# Altium PCB Review_2510_RegulationChauffage_Motherboard.PcbDoc (part 2 of 2)
Units mm, origin at the board's own origin, x right, y up, seen from the top; angles counter-clockwise.
Board outline 110.26 x 190.25 mm, 2 copper layers (Top Layer, Bottom Layer), stack 1.586 mm thick; 113 components, 95 nets, 627 pads, 337 vias.
Unrouted connection lines stored in the file: 154.
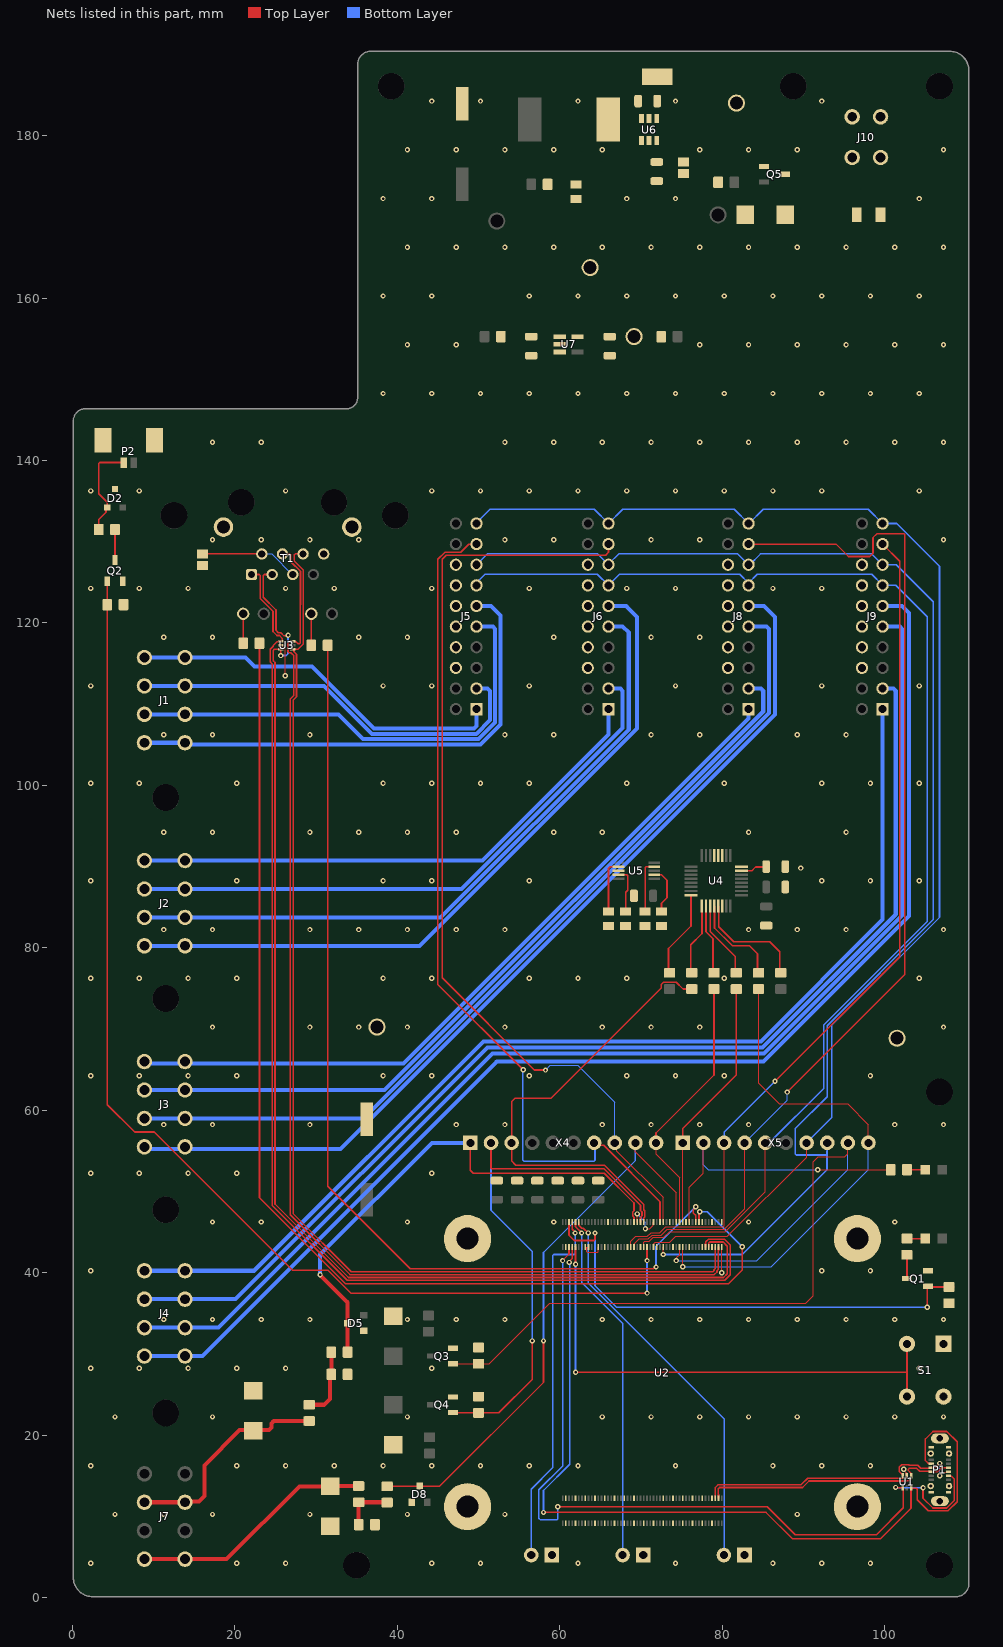
[diagram p2: the nets of this part, all layers, seen from the top]

## Via types
v1: diameter 0.65, hole 0.3, Top Layer to Bottom Layer, tented top, 337 vias

## Nets (pads, with @x,y where several pads share a name; then routed paths per layer and width w, separated by ;. In a path a pad name is that pad's centre, name@x,y a point inside that pad or via, vN(x,y) a via of type N, cw(c..) or ccw(c..) an arc to the next point about the centre after c; other vN are vias at no path point) (continued)
BOILER_IN+_1: J1.5 J1.6 J5.9 | length 59.2
  Bottom Layer w0.5: J1.6@8.87,108.75 J1.5@13.87,108.75 32.75,108.75 35.802,105.698 49.996,105.698 52.056,107.758 52.056,119.257 51.763,119.55 J5.9@49.75,119.55
BOILER_IN+_2: J2.5 J2.6 J6.9 | length 84.8
  Bottom Layer w0.5: J2.6@8.25,83.75 J2.5@13.87,83.75 45.341,83.75 68.5,106.909 68.5,118.8 67.75,119.55 J6.9@66,119.55 J6.9@65.75,119.55
BOILER_IN+_3: J3.5 J3.6 J8.9 | length 111.3
  Bottom Layer w0.5: J3.6@8.5,59 13.62,59 13.87,58.75 J3.5@13.87,59 35.856,59 85.75,108.894 85.75,119.257 85.457,119.55 J8.9@83.25,119.55
BOILER_IN+_4: J4.5 J4.6 J9.9 | length 152.7
  Bottom Layer w0.5: J4.6@8.25,33.25 J4.5@13.87,33.25 18,33.25 51.75,67 85.153,67 102.16,84.007 102.16,119.257 101.867,119.55 J9.9@99.75,119.55
BOILER_IN-_1: J1.7 J1.8 J5.11 | length 61.8
  Bottom Layer w0.5: J1.8@8.87,105.25 J1.7@13.87,105.25 14.073,105.047 50.266,105.047 52.707,107.488 52.707,120.923 51.54,122.09 J5.11@49.75,122.09
BOILER_IN-_2: J2.7 J2.8 J6.11 | length 90.1
  Bottom Layer w0.5: J2.8@8.25,80.25 J2.7@13.87,80.25 42.762,80.25 69.5,106.988 69.5,120.75 68.188,122.062 J6.11@66,122.062
BOILER_IN-_3: J3.7 J3.8 J8.11 | length 116.2
  Bottom Layer w0.5: J3.8@8.25,55.25 13.87,55.25 33.026,55.25 86.5,108.724 86.5,120.75 85.16,122.09 J8.11@83.25,122.09
BOILER_IN-_4: J4.7 J4.8 J9.11 | length 158.1
  Bottom Layer w0.5: J4.8@8.25,29.75 J4.7@13.87,29.75 16,29.75 52.25,66 85.073,66 103,83.927 103,121.25 102.16,122.09 J9.11@99.75,122.09
CM_24V_OUT_1: Q3.1 R19.2 U2.28 X5.9 | length 101.3
  Top Layer w0.15: Q3.1@46.85,28.8 R19.2@50,28.8 51.3,28.8 58.745,36.245 90.302,36.245 91.199,37.142 91.199,53.699 91.804,54.304 95.105,54.304 95.47,54.669 X5.9@95.47,56 ; v1(74.35,41.5) 74.414,41.564 74.414,41.914 74.75,42.25 U2.28@74.75,43.17
  Bottom Layer w0.15: v1(74.35,41.5) 84.275,41.5 95.47,52.695 X5.9@95.47,56
CM_24V_OUT_2: Q4.1 R25.2 U2.51 X4.2 | length 68.4
  Top Layer w0.2: Q4.1@46.85,22.8 46.875,22.775 49.975,22.775 R25.2@50,22.75 52.5,22.75 56.62,26.87 v1(56.62,31.607) ; X4.2@51.54,56 51.54,52.889 51.628,52.801 65.463,52.801 69.95,48.314 69.95,47.661 70.126,47.485 70.126,47.008 69.95,46.832 U2.51@69.95,46.25
  Bottom Layer w0.2: X4.2@51.54,56 51.54,47.71 56.62,42.63 v1(56.62,31.607)
CM_24V_SENSE_1: D5.3 R21.2 U2.55 X4.1 | length 65.3
  Top Layer w0.2: X4.1@49,56 49,52.617 49.367,52.25 65.5,52.25 69.15,48.6 69.15,47.661 68.974,47.485 68.974,47.008 69.15,46.832 U2.55@69.15,46.25
  Top Layer w0.5: v1(30.5,39.75) 33.88,36.37 R21.2@33.88,30.225
  Bottom Layer w0.5: v1(30.5,39.75) 30.5,42.25 44.25,56 X4.1@49,56
CM_24V_SENSE_2: D8.3 R26.2 U2.29 X4.9 | length 70.6
  Top Layer w0.15: X4.9@69.32,56 69.32,54.878 74.35,49.848 U2.29@74.35,46.25
  Top Layer w0.2: R26.2@38.75,13.707 45.207,13.707 58,26.5 v1(58,31.607)
  Bottom Layer w0.2: v1(58,31.607) 58,42.5 69.32,53.82 X4.9@69.32,56
CMD_RELAY: J5.13 J6.13 J8.13 J9.13 U2.50 X5.5 | length 158.2
  Top Layer w0.15: U2.50@70.35,43.17 70.35,43.745 70.497,43.892 71.051,43.892 71.507,44.348 72.393,44.348 72.793,44.348 73.517,45.072 80.393,45.072 85.31,49.989 X5.5@85.31,56
  Bottom Layer w0.2: J5.13@49.75,124.63 49.75,124.96 50.79,126 64.63,126 J6.13@66,124.63 67.37,126 82.162,126 J8.13@83.25,124.912 ; J8.13@83.25,124.63 J8.13@83.25,124.912 ; X5.5@85.31,56 85.809,56 92.5,62.691 92.5,70.5 105.25,83.25 105.25,120.75 101.37,124.63 J9.13@99.75,124.63 99.75,124.67 98.42,126 84.33,126 83.25,124.92 J8.13@83.25,124.912
CS_ADC: R8.2 U2.49 X4.3 | length 56.9
  Top Layer w0.2: U2.49@70.35,46.25 70.35,46.736 70.477,46.863 70.477,47.631 70.35,47.758 70.35,48.411 65.511,53.25 54.588,53.25 54.08,53.758 X4.3@54.08,56 54.08,61.08 54.5,61.5 58.92,61.5 72.52,75.1 72.52,75.52 72.782,75.782 74.335,75.782 75.186,74.931 R8.2@76.261,74.931
ETH_LEDG: R2.2 U2.15 | length 143.9
  Top Layer w0.2: R2.2@23.035,117.5 23.035,49.251 33.623,38.663 80.775,38.663 82.466,40.354 v1(82.466,43.21) ; U2.15@77.15,46.25 77.15,47.276 77.252,47.378 v1(77.252,47.5)
  Bottom Layer w0.2: v1(77.252,47.5) 78.176,47.5 v1(82.466,43.21)
ETH_LEDY: R3.2 U2.17 | length 122.9
  Top Layer w0.2: R3.2@31.425,117.25 31.425,50.663 41.602,40.486 71.518,40.486 71.743,40.711 v1(71.86,40.711) ; U2.17@76.75,46.25 76.75,47.065 76.451,47.364 76.451,47.723 76.75,48.022 v1(76.75,48.144)
  Bottom Layer w0.2: v1(71.86,40.711) 71.86,43.254 v1(76.75,48.144)
ETH_RD_N: T1.6 U2.6 U3.4 | length 141.8
  Top Layer w0.2: U3.4@27.135,116.75 27.232,116.75 27.287,116.695 27.287,116.452 27.601,116.137 27.601,110.916 27.174,110.489 27.174,47.287 34.326,40.135 78.879,40.135 78.997,40.253 78.997,40.388 79.17,40.562 79.17,42.675 79.15,42.696 U2.6@79.15,43.17 ; U3.4@27.232,116.805 27.254,116.783 27.822,116.783 28.438,117.398 28.438,117.861 28.414,117.885 28.414,122.06 28.445,122.091 28.445,126.503 27.315,127.633 27.315,128.383 27.432,128.5 T1.6@28.405,128.5
ETH_RD_P: T1.4 U2.4 U3.6 | length 143.9
  Top Layer w0.2: T1.4@25.865,128.5 26.838,128.5 26.955,128.383 26.955,127.484 28.086,126.354 28.086,122.24 28.055,122.209 28.055,117.736 28.078,117.713 28.078,117.547 27.961,117.43 27.795,117.43 27.53,117.695 27.19,117.695 U3.6@27.135,117.75 ; U3.6@26.968,117.656 26.701,117.656 26.554,117.509 26.554,116.491 26.701,116.344 26.887,116.344 27.242,115.989 27.242,111.065 26.815,110.637 26.815,47.138 34.177,39.776 79.028,39.776 79.356,40.104 79.356,40.24 79.53,40.413 79.53,42.675 79.55,42.696 U2.4@79.55,43.17
ETH_TD_N: T1.3 U2.10 U3.3 | length 149.7
  Top Layer w0.2: T1.3@24.595,125.96 23.622,125.96 23.505,125.843 23.505,123.166 25.066,121.604 25.066,119.086 25.343,118.809 25.643,118.809 26.046,118.406 26.471,118.406 v1(26.554,118.489) ; v1(25.665,115.989) U3.3@25.665,116.75 24.855,116.75 24.722,116.617 24.722,115.358 24.95,115.13 24.95,48.475 34,39.425 80.171,39.425 80.642,39.897 80.642,43.283 80.14,43.785 78.467,43.785 78.35,43.667 U2.10@78.35,43.17
  Bottom Layer w0.2: v1(25.665,115.989) 26.351,115.989 26.554,116.192 v1(26.554,118.489)
ETH_TD_P: T1.1 U2.12 U3.1 | length 149.3
  Top Layer w0.2: T1.1@22.055,125.96 23.028,125.96 23.145,125.843 23.145,123.017 24.707,121.456 24.707,118.937 25.194,118.45 25.494,118.45 25.856,118.088 25.856,117.805 25.801,117.75 25.49,117.75 25.443,117.703 25.203,117.703 24.722,117.222 24.722,117.125 24.363,116.766 24.363,115.209 24.591,114.981 24.591,48.326 33.851,39.066 80.319,39.066 81.002,39.748 81.002,43.431 80.289,44.144 78.318,44.144 77.991,43.816 77.991,43.685 77.95,43.644 U2.12@77.95,43.17
FRONT_LED: Q2.1 R7.2 U2.48 | length 146.2
  Top Layer w0.2: Q2.1@4.3,125.14 R7.2@4.3,122.25 4.3,60.7 7.675,57.325 10.1,57.325 27.099,40.326 31.464,40.326 34.29,37.5 v1(70.75,37.5) ; v1(70.75,41.5) U2.48@70.75,43.17
  Bottom Layer w0.2: v1(70.75,37.5) v1(70.75,41.5)
GND: C1.2 C2.2 C3.1 C4.2 C5.2 C6.2 C7.2 C8.2 C9.2 C10.2 C11.1 C13.2 C14.1 C15.1 C16.1 C17.1 C18.2 D2.3 D3.2 D4.2 D5.1 D6.2 D7.2 D8.1 D9.2 J5.6 J5.8 J5.10 J5.12 J5.14 J5.16 J6.6 J6.8 J6.10 J6.12 J6.14 J6.16 J8.6 J8.8 J8.10 J8.12 J8.14 J8.16 J9.6 J9.8 J9.10 J9.12 J9.14 J9.16 J10.3 J10.4 P1.A1 P1.A12 P1.B1 P1.B12 P1.Shell P2.MP1 P2.MP2 Q1.2 Q2.2 Q3.2 Q4.2 Q5.1 R5.1 R7.1 R14.1 R15.1 R16.1 R17.1 R19.1 R22.1 R25.1 R27.1 R30.1 S1.13 T1.8 T1.Shell TP1.1 TP2.1 TP3.1 TP4.1 U1.2 U2.1 U2.2 U2.7 U2.8 U2.13 U2.14 U2.22 U2.23 U2.32 U2.33 U2.42 U2.43 U2.52 U2.53 U2.59 U2.60 U2.65 U2.66 U2.71 U2.74 U2.98 U2.107 U2.108 U2.113 U2.114 U2.119 U2.120 U2.125 U2.126 U2.131 U2.132 U2.137 U2.138 U2.144 U2.150 U2.155 U2.156 U2.161 U2.162 U2.167 U2.168 U2.173 U2.174 U2.179 U2.180 U2.185 U2.186 U2.191 U2.192 U2.197 U2.198 U2.SH1 U2.SH2 U2.SH3 U2.SH4 U3.2 U4.14 U4.24 U4.27 U4.28 U4.29 U5.3 U6.4 U7.2 X1.1 X2.1 X3.1 | length 13.1
  Top Layer w0.15: U3.2@25.665,117.25 25.745,117.17 26.05,117.17 26.221,116.999 26.221,113.544 v1(26.193,113.516) ; U2.53@69.55,46.25 v1(69.55,47.247) ; v1(70.55,45.435) 71.104,45.435 71.525,45.855 71.525,46.225 U2.43@71.55,46.25 ; U2.8@78.75,43.17 U2.8@78.775,43.195 ; v1(79.932,40.001) 79.941,40.01 79.941,43.161 U2.2@79.95,43.17 ; v1(102.354,15.806) 102.354,15.701 102.67,15.385 102.67,15.08 U1.2@102.75,15
  Bottom Layer w0.15: v1(69.55,47.247) 70.55,46.247 v1(70.55,45.435)
  other v1: 2.25,4.25 20.25,4.25 26.25,4.25 44.25,4.25 50.25,4.25 62.25,4.25 74.25,4.25 86.25,4.25 92.25,4.25 98.25,4.25 5.25,10.25 11.25,10.25 17.25,10.25 29.25,10.25 41.25,10.25 53.25,10.25 89.25,10.25 2.25,16.25 20.25,16.25 26.25,16.25 32.25,16.25 38.25,16.25 44.25,16.25 50.25,16.25 56.25,16.25 62.25,16.25 74.25,16.25 86.25,16.25 92.25,16.25 98.25,16.25 5.25,22.25 17.25,22.25 41.25,22.25 65.25,22.25 71.25,22.25 77.25,22.25 83.25,22.25 89.25,22.25 95.25,22.25 101.25,22.25 107.25,22.25 2.25,28.25 8.25,28.25 14.25,28.25 20.25,28.25 26.25,28.25 44.25,28.25 104.25,28.25 11.25,34.25 17.25,34.25 23.25,34.25 29.25,34.25 41.25,34.25 47.25,34.25 53.25,34.25 65.25,34.25 71.25,34.25 77.25,34.25 83.25,34.25 89.25,34.25 95.25,34.25 101.25,34.25 107.25,34.25 2.25,40.25 92.25,40.25 98.25,40.25 17.25,46.25 23.25,46.25 41.25,46.25 59.25,46.25 83.25,46.25 101.25,46.25 2.25,52.25 8.25,52.25 14.25,52.25 20.25,52.25 44.25,52.25 11.25,58.25 17.25,58.25 29.25,58.25 47.25,58.25 53.25,58.25 65.25,58.25 71.25,58.25 77.25,58.25 83.25,58.25 101.25,58.25 107.25,58.25 2.25,64.25 8.25,64.25 14.25,64.25 20.25,64.25 38.25,64.25 44.25,64.25 56.25,64.25 68.25,64.25 74.25,64.25 80.25,64.25 98.25,64.25 17.25,70.25 29.25,70.25 35.25,70.25 41.25,70.25 53.25,70.25 65.25,70.25 71.25,70.25 77.25,70.25 107.25,70.25 2.25,76.25 8.25,76.25 14.25,76.25 20.25,76.25 38.25,76.25 44.25,76.25 56.25,76.25 62.25,76.25 68.25,76.25 80.25,76.25 104.25,76.25 11.25,82.25 17.25,82.25 29.25,82.25 35.25,82.25 41.25,82.25 47.25,82.25 53.25,82.25 83.25,82.25 89.25,82.25 95.25,82.25 107.25,82.25 2.25,88.25 20.25,88.25 38.25,88.25 44.25,88.25 56.25,88.25 92.25,88.25 98.25,88.25 104.25,88.25 89.66,89.82 11.25,94.25 17.25,94.25 29.25,94.25 35.25,94.25 41.25,94.25 47.25,94.25 59.25,94.25 65.25,94.25 83.25,94.25 95.25,94.25 2.25,100.25 8.25,100.25 20.25,100.25 38.25,100.25 44.25,100.25 50.25,100.25 56.25,100.25 68.25,100.25 80.25,100.25 92.25,100.25 98.25,100.25 104.25,100.25 11.25,106.25 17.25,106.25 29.25,106.25 53.25,106.25 59.25,106.25 71.25,106.25 77.25,106.25 89.25,106.25 95.25,106.25 2.25,112.25 38.25,112.25 44.25,112.25 56.25,112.25 74.25,112.25 92.25,112.25 104.25,112.25 11.25,118.25 17.25,118.25 35.25,118.25 41.25,118.25 59.25,118.25 71.25,118.25 77.25,118.25 2.25,124.25 8.25,124.25 14.25,124.25 26.25,124.25 32.25,124.25 44.25,124.25 56.25,124.25 68.25,124.25 74.25,124.25 86.25,124.25 92.25,124.25 17.25,130.25 23.25,130.25 29.25,130.25 35.25,130.25 53.25,130.25 59.25,130.25 71.25,130.25 77.25,130.25 107.25,130.25 2.25,136.25 8.25,136.25 26.25,136.25 44.25,136.25 50.25,136.25 56.25,136.25 62.25,136.25 68.25,136.25 74.25,136.25 80.25,136.25 86.25,136.25 92.25,136.25 104.25,136.25 17.25,142.25 23.25,142.25 53.25,142.25 59.25,142.25 65.25,142.25 71.25,142.25 77.25,142.25 83.25,142.25 89.25,142.25 95.25,142.25 101.25,142.25 107.25,142.25 38.25,148.25 44.25,148.25 50.25,148.25 56.25,148.25 62.25,148.25 68.25,148.25 74.25,148.25 80.25,148.25 86.25,148.25 92.25,148.25 98.25,148.25 104.25,148.25 41.25,154.25 47.25,154.25 77.25,154.25 83.25,154.25 89.25,154.25 95.25,154.25 101.25,154.25 107.25,154.25 38.25,160.25 44.25,160.25 56.25,160.25 62.25,160.25 68.25,160.25 74.25,160.25 80.25,160.25 86.25,160.25 92.25,160.25 98.25,160.25 104.25,160.25 41.25,166.25 47.25,166.25 53.25,166.25 59.25,166.25 65.25,166.25 71.25,166.25 77.25,166.25 83.25,166.25 89.25,166.25 95.25,166.25 101.25,166.25 107.25,166.25 38.25,172.25 44.25,172.25 68.25,172.25 74.25,172.25 104.25,172.25 41.25,178.25 47.25,178.25 53.25,178.25 59.25,178.25 65.25,178.25 77.25,178.25 83.25,178.25 89.25,178.25 107.25,178.25 44.25,184.25 50.25,184.25 62.25,184.25 74.25,184.25 92.25,184.25
IN_24V_SENSE_1: D4.1 J7.3 J7.4 R20.2 | length 27.6
  Top Layer w0.5: J7.4@8.25,11.75 13.25,11.75 13.327,11.827 15.577,11.827 16.25,12.5 16.25,16.3 20.6,20.65 22.175,20.65 D4.1@22.25,20.575 ; D4.1@22.325,20.65 24.207,20.65 24.5,20.943 24.5,21.457 24.793,21.75 R20.2@29.267,21.75
IN_24V_SENSE_2: D6.1 J7.7 J7.8 R24.2 | length 30.7
  Top Layer w0.5: J7.8@8.25,4.75 13.25,4.75 19,4.75 27.957,13.707 30.75,13.707 30.793,13.75 R24.2@35.25,13.75
LED_ACTIVITY: R1.1 U2.21 X5.2 | length 36.2
  Top Layer w0.15: U2.21@75.95,46.25 75.95,50.542 77.69,52.282 X5.2@77.69,55.74 ; v1(91.75,52.695) R1.1@100.75,52.695
  Bottom Layer w0.15: X5.2@77.69,56 77.69,53.31 78.305,52.695 v1(91.75,52.695)
LED_PWR: Q1.1 R5.2 U2.95 | length 60.3
  Top Layer w0.2: U2.95@61.15,46.25 61.15,44.614 61.784,43.98 64.217,43.98 64.344,44.108 v1(64.344,44.897) ; v1(105.25,35.75) 105.25,38.245 Q1.1@105.35,38.345 105.45,38.245 R5.2@108.5,38.245
  Bottom Layer w0.2: v1(64.344,44.897) 64.344,38.402 66.996,35.75 v1(105.25,35.75)
NetC8_1: C8.1 T1.2 T1.5 | length 12.2
  Top Layer w0.2: C8.1@16,128.5 T1.2@23.325,128.5
  Bottom Layer w0.15: T1.2@23.325,128.5 24.555,128.5 27.095,125.96 T1.5@27.135,125.96
NetC11_2: C11.2 U4.23 | length 2.9
  Top Layer w0.2: U4.23@82.361,89.499 83.661,89.499 84.111,89.949 C11.2@85.066,89.949
NetC12_1: C12.1 J11.1 L1.1 U6.5
NetC12_2: C12.2 U6.6
NetC13_1: C13.1 C14.2 R28.2 U6.2 U6.3
NetC16_2: C16.2 R32.1 TP7.1 U7.5
NetC17_2: C17.2 R31.2 U7.1 U7.3
NetD1_1: D1.1 R1.2 | length 2.2
  Top Layer w0.2: R1.2@102.75,52.695 D1.1@105,52.695
NetD2_1: D2.1 P2.2 R6.2 | length 12.1
  Top Layer w0.2: R6.2@3.25,131.5 3.25,132.75 4.137,133.637 4.137,134.047 D2.1@4.3,134.21 4.3,134.85 3.25,135.9 3.25,139.633 3.367,139.75 P2.2@6.3,139.75
NetD9_1: D9.1 F1.2 Q5.3
NetDS1_2: DS1.2 R4.2 | length 2.5
  Top Layer w0.2: R4.2@102.75,44.21 DS1.2@105.29,44.21
NetF1_1: F1.1 J10.1 J10.2
NetQ1_3: Q1.3 R4.1 | length 2.7
  Top Layer w0.2: Q1.3@102.75,39.295 R4.1@102.75,42
NetQ2_3: Q2.3 R6.1 | length 3.8
  Top Layer w0.2: Q2.3@5.25,127.74 R6.1@5.25,131.5
NetR2_1: R2.1 T1.9 | length 3.6
  Top Layer w0.2: R2.1@21.035,117.5 T1.9@21.035,121.13
NetR3_1: R3.1 T1.11 | length 3.9
  Top Layer w0.2: R3.1@29.425,117.25 T1.11@29.425,121.13
NetR8_1: R8.1 U4.9 | length 8.8
  Top Layer w0.2: R8.1@76.261,76.931 76.133,77.059 76.133,80.383 77.511,81.761 U4.9@77.511,85.149
NetR9_1: R9.1 U4.11 | length 9.6
  Top Layer w0.2: U4.11@78.511,85.149 78.511,82.049 81.611,78.949 81.611,77.059 R9.1@81.739,76.931
NetR10_1: R10.1 U4.10 | length 8.6
  Top Layer w0.2: U4.10@78.011,85.149 78.011,81.97 78.872,81.109 78.872,77.059 R10.1@79,76.931
NetR11_1: R11.1 U4.12 | length 11.7
  Top Layer w0.2: U4.12@79.011,85.149 79.061,85.099 79.061,82.449 81.261,80.249 83.361,80.249 84.35,79.26 84.35,77.059 R11.1@84.478,76.931
NetR12_1: R12.1 U4.13 | length 14
  Top Layer w0.2: U4.13@79.511,85.149 79.561,85.099 79.561,82.596 81.408,80.749 85.861,80.749 87.089,79.521 87.089,77.059 R12.1@87.217,76.931
NetR13_1: R13.1 U4.8 | length 10.8
  Top Layer w0.2: R13.1@73.522,76.931 73.394,77.059 73.394,79.932 76.161,82.699 U4.8@76.161,86.499
NetR14_2: R14.2 U5.2 | length 6.6
  Top Layer w0.2: R14.2@65.998,84.499 65.998,89.794 66.203,89.999 U5.2@67.244,89.999
NetR15_2: R15.2 U5.9 | length 6.6
  Top Layer w0.2: R15.2@70.515,84.499 70.515,89.882 70.632,89.999 U5.9@71.644,89.999
NetR16_2: R16.2 U5.4 | length 5.6
  Top Layer w0.2: U5.4@67.246,88.997 68.244,88.997 68.361,88.88 68.361,87.085 68.111,86.835 R16.2@68.111,84.499
NetR17_2: R17.2 U5.7 | length 5.9
  Top Layer w0.2: U5.7@71.644,88.999 72.52,88.999 73.202,88.317 73.202,86.181 72.526,85.505 R17.2@72.526,84.499
NetR20_1: R20.1 R21.1 R22.2 | length 8.7
  Top Layer w0.5: R20.1@29.165,23.75 30.964,23.75 31.695,24.481 31.695,27.303 R22.2@31.88,27.488 R21.1@31.88,30.225
NetR24_1: R24.1 R26.1 R27.2 | length 5.6
  Top Layer w0.5: R27.2@35.25,9.509 R24.1@35.25,11.572 ; R24.1@35.25,11.75 38.707,11.75 R26.1@38.75,11.707
NetR29_2: R29.2 R30.2 U6.1
NetU2_78: U2.78 U2.84 U2.86 | length 3
  Top Layer w0.15: U2.86@63.15,43.17 63.35,43.17 ; U2.84@63.55,43.17 63.35,43.17 ; U2.78@64.75,43.17 64.75,42.607 64.662,42.52 63.438,42.52 63.35,42.607 63.35,43.17
NetU2_89: U2.89 X2.2 | length 48.5
  Top Layer w0.2: U2.89@62.35,46.25 62.35,45.845 62.695,45.5 62.906,45.5 v1(63.502,44.904)
  Bottom Layer w0.2: v1(63.502,44.904) 63.502,38.748 80.25,22 X2.2@80.25,5.25
NetU2_91: U2.91 X3.2 | length 43.4
  Top Layer w0.2: U2.91@61.95,46.25 61.95,45.655 62.694,44.911 v1(62.694,44.897)
  Bottom Layer w0.2: v1(62.694,44.897) 62.701,44.891 62.701,38.799 67.75,33.75 X3.2@67.75,5.25
NetU2_93: U2.93 X1.2 | length 44.8
  Top Layer w0.2: U2.93@61.55,46.25 61.55,45.362 61.893,45.019 v1(61.893,44.897)
  Bottom Layer w0.2: X1.2@56.5,5.25 56.5,13.365 59.153,16.018 59.153,42.133 59.27,42.25 61.776,42.25 61.893,42.367 v1(61.893,44.897)
PWR_BTN: S1.14 U2.92 | length 62.7
  Top Layer w0.2: v1(61.95,27.75) 102.75,27.75 ; v1(61.95,41.062) U2.92@61.95,43.17 ; S1.14@102.75,24.75 102.75,27.75 ; S1.14@102.75,31.25 102.75,27.75
  Bottom Layer w0.2: v1(61.95,27.75) v1(61.95,41.062)
SENSOR_IN+_1: J1.1 J1.2 J5.1 | length 46.7
  Bottom Layer w0.5: J1.2@8.87,115.75 21.317,115.75 22.435,114.632 29.504,114.632 37.136,107 49.457,107 49.75,107.293 J5.1@49.75,109.39
SENSOR_IN+_2: J2.1 J2.2 J6.1 | length 67.1
  Bottom Layer w0.5: J2.2@8.5,90.75 13.5,90.75 J2.1@13.87,90.75 50.5,90.75 66,106.25 J6.1@66,109.39
SENSOR_IN+_3: J3.1 J3.2 J8.1 | length 93.7
  Bottom Layer w0.5: J3.2@8.25,65.75 40.75,65.75 83.25,108.25 J8.1@83.25,109.39
SENSOR_IN+_4: J4.1 J4.2 J9.1 | length 135.3
  Bottom Layer w0.5: J4.2@8.25,40.25 J4.1@13.87,40.25 22.345,40.25 50.595,68.5 84.775,68.5 99.75,83.475 J9.1@99.75,109.39
SENSOR_IN-_1: J1.3 J1.4 J5.3 | length 51.1
  Bottom Layer w0.5: J1.4@8.87,112.25 J1.3@13.87,112.25 30.965,112.25 36.866,106.349 49.727,106.349 51.405,108.027 51.405,111.637 51.112,111.93 J5.3@49.75,111.93
SENSOR_IN-_2: J2.3 J2.4 J6.3 | length 74.1
  Bottom Layer w0.5: J2.4@8.25,87.25 J2.3@13.87,87.25 47.921,87.25 67.75,107.079 67.75,111.637 67.457,111.93 J6.3@66,111.93
SENSOR_IN-_3: J3.3 J3.4 J8.3 | length 101
  Bottom Layer w0.5: J3.4@8.25,62.25 8.5,62.5 13.62,62.5 13.87,62.25 J3.3@13.87,62.5 38.435,62.5 85.056,109.121 85.056,111.637 84.763,111.93 J8.3@83.25,111.93
SENSOR_IN-_4: J4.3 J4.4 J9.3 | length 142
  Bottom Layer w0.5: J4.4@8.25,36.75 J4.3@13.87,36.75 20.095,36.75 51.095,67.75 84.982,67.75 101.37,84.138 101.37,111.637 101.077,111.93 J9.3@99.75,111.93
SHIFT_CLK: J5.15 J6.15 J8.15 J9.15 U2.38 X5.8 | length 169.2
  Top Layer w0.15: v1(72.75,42.25) U2.38@72.75,43.17
  Bottom Layer w0.2: J5.15@49.75,127.17 51.08,128.5 64.67,128.5 J6.15@66,127.17 66,127.25 67.25,128.5 81.92,128.5 J8.15@83.25,127.17 83.377,127.17 84.707,128.5 98.42,128.5 J9.15@99.75,127.17 101.447,127.17 106,122.617 106,83.5 92.93,70.43 92.93,61.68 89,57.75 89,56.048 cw(c87.85,56) 89,55.952 89,54.617 89.117,54.5 92.907,54.5 ; v1(72.75,42.25) 82.455,42.25 92.907,52.702 92.907,54.5 ; 92.907,55.045 92.907,54.5 ; 92.93,55.045 X5.8@92.93,56
SHIFT_DATA: J5.19 J6.19 J8.19 J9.19 U2.44 X5.7 | length 167
  Top Layer w0.15: U2.44@71.55,43.17 71.575,43.195 71.575,43.565 71.756,43.746 72.144,43.746 73.531,43.746 74.255,44.47 80.642,44.47 90.39,54.218 X5.7@90.39,55.74
  Bottom Layer w0.2: J5.19@49.75,132.25 49.75,132.345 51.405,134 64.25,134 J6.19@66,132.25 67.75,134 81.5,134 J8.19@83.25,132.25 83.306,132.25 85.056,134 98,134 J9.19@99.75,132.25 101.5,132.25 106.75,127 106.75,83.75 93.5,70.5 93.5,59.11 X5.7@90.39,56 90.74,56.095 X5.7@90.796,56.151
SHIFT_LATCH_1: J5.17 U2.39 X4.7 | length 108.6
  Top Layer w0.2: J5.17@49.75,129.71 49.732,129.692 48.813,129.692 47.826,128.705 45.876,128.705 45,127.829 45,75.5 v1(55.5,65) ; X4.7@64.24,56 64.545,55.695 65.412,55.695 72.35,48.757 U2.39@72.35,46.25
  Bottom Layer w0.2: v1(55.5,65) 55.469,64.969 55.469,53.867 55.586,53.75 64.227,53.75 64.344,53.867 64.344,55.896 X4.7@64.24,56
SHIFT_LATCH_2: J6.17 U2.37 X4.8 | length 118.7
  Top Layer w0.15: X4.8@66.78,56 67.045,55.735 67.045,54.974 72.75,49.269 U2.37@72.75,46.25
  Top Layer w0.2: v1(58.25,64.958) 56.872,64.958 45.525,76.305 45.525,127.833 46.047,128.354 65.649,128.354 66,128.705 J6.17@66,129.71
  Bottom Layer w0.15: v1(58.25,64.958) 58.816,65.524 62.25,65.524 66.78,60.994 X4.8@66.78,56
SHIFT_LATCH_3: J8.17 U2.56 X5.4 | length 129.2
  Top Layer w0.15: U2.56@69.15,43.17 69.175,43.195 69.175,43.565 69.803,44.193 70.926,44.193 71.382,44.649 72.518,44.649 73.242,45.373 80.268,45.373 82.77,47.875 X5.4@82.77,56
  Top Layer w0.2: J8.17@83.25,129.71 94.016,129.71 95.551,128.175 98.152,128.175 98.566,128.589 98.566,130.51 99.056,131 102.383,131 102.5,130.883 102.5,76.75 v1(88,62.25)
  Bottom Layer w0.15: X5.4@82.77,56 88,61.23 v1(88,62.25)
SHIFT_LATCH_4: J9.17 U2.58 X5.3 | length 106.8
  Top Layer w0.15: U2.58@68.75,43.17 68.75,43.887 69.357,44.494 70.802,44.494 71.258,44.95 72.324,44.95 73.048,45.674 80.144,45.674 80.276,45.806 X5.3@80.276,56
  Top Layer w0.2: v1(86.5,63.571) 101.851,78.922 101.851,127.609 J9.17@99.75,129.71
  Bottom Layer w0.2: X5.3@80.23,56 80.251,56.021 80.251,57.322 v1(86.5,63.571)
SPI_MISO_ADC: R11.2 U2.26 X5.10 | length 63
  Top Layer w0.15: v1(75.15,40.75) U2.26@75.15,43.17 ; R11.2@84.478,74.931 84.478,63.332 87.016,60.794 95.446,60.794 98.01,58.23 X5.10@98.01,56
  Bottom Layer w0.15: v1(75.15,40.75) 86.065,40.75 98.01,52.695 X5.10@98.01,56
SPI_MOSI_ADC: R10.2 U2.27 X4.10 | length 32.8
  Top Layer w0.15: X4.10@71.86,56 71.86,54.594 74.75,51.704 U2.27@74.75,46.25
  Top Layer w0.2: X4.10@71.86,56 71.86,57.21 79,64.35 R10.2@79,74.931
SPI_SCLK_ADC: R9.2 U2.25 X5.1 | length 31.6
  Top Layer w0.15: U2.25@75.15,46.25 75.15,55.6 X5.1@75.55,56
  Top Layer w0.2: X5.1@75.15,56 75.15,57.75 81.739,64.339 R9.2@81.739,74.931
USB_CC1: P1.A5 U1.6 U2.94 | length 108.7
  Top Layer w0.2: v1(58,10.5) 85.405,10.5 88.655,7.25 99.5,7.25 103.25,11 U1.6@103.25,13.53 103.305,13.475 103.883,13.475 104,13.358 104,12.067 105.379,10.688 107.798,10.688 108.927,11.817 108.927,19.186 107.652,20.461 105.948,20.461 105.024,19.537 105.024,16.896 105.37,16.55 105.7,16.55 P1.A5@105.75,16.5 ; v1(61.178,41.275) 61.178,41.397 61.55,41.769 U2.94@61.55,43.17
  Bottom Layer w0.2: v1(58,10.5) 58,13.195 61.25,16.445 61.25,41.203 v1(61.178,41.275)
USB_CC2: P1.B5 U1.4 U2.96 | length 100.6
  Top Layer w0.2: v1(59.75,11.21) 85.54,11.21 89,7.75 99,7.75 102.305,11.055 U1.4@102.305,13.53 ; v1(60.35,41.5) 61.15,42.3 U2.96@61.15,43.17 ; v1(101.35,13.575) 101.395,13.53 U1.4@102.25,13.53 ; v1(104.728,13.53) 104.728,12.258 105.948,11.039 107.652,11.039 108.576,11.963 108.576,14.604 108.23,14.95 107.9,14.95 P1.B5@107.85,15
  Bottom Layer w0.2: v1(59.75,11.21) 59.75,9.69 59.633,9.573 57.635,9.573 57.424,9.784 57.424,13.271 60.35,16.197 v1(60.35,41.5) ; v1(101.35,13.575) 101.372,13.553 104.706,13.553 v1(104.728,13.53)
USB_N: P1.A7 P1.B7 U1.1 U2.103 | length 32.1
  Top Layer w0.2: U2.103@79.55,12.25 79.55,12.724 79.53,12.745 79.53,13.428 79.667,13.566 89.888,13.566 90.684,14.361 102.444,14.361 102.502,14.419 103.009,14.419 103.195,14.605 103.195,14.945 U1.1@103.25,15 103.195,15.055 103.195,15.395 102.93,15.66 102.93,15.826 103.047,15.943 103.934,15.943 104.306,15.57 105.28,15.57 105.301,15.55 105.7,15.55 P1.A7@105.75,15.5 106.485,15.5 106.892,15.906 106.968,15.982 107.832,15.982 P1.B7@107.85,16
USB_P: P1.A6 P1.B6 U1.3 U2.105 | length 34.9
  Top Layer w0.12: v1(106.8,15) 106.8,15.129 107.135,15.464 107.814,15.464 P1.B6@107.85,15.5
  Top Layer w0.2: U2.105@79.15,12.25 79.15,12.724 79.17,12.745 79.17,13.577 79.518,13.925 89.74,13.925 90.535,14.72 102.145,14.72 102.25,14.825 102.25,15.175 102.195,15.23 102.115,15.23 101.778,15.567 101.778,16.045 102.115,16.382 102.967,16.382 103.047,16.302 104.082,16.302 104.455,15.93 105.28,15.93 105.301,15.95 105.7,15.95 P1.A6@105.75,16 105.8,16.05 106.35,16.05 106.79,16.49 v1(106.79,16.53)
  Bottom Layer w0.12: v1(106.79,16.53) 106.8,16.52 v1(106.8,15)
pads on no net: D5.2 D8.2 P1.A4 P1.A8 P1.A9 P1.B4 P1.B8 P1.B9 PTH1.1 PTH2.1 PTH3.1 PTH4.1 PTH5.1 PTH6.1 PTH7.1 PTH8.1 PTH9.1 PTH10.1 PTH11.1 PTH12.1 T1.7 T1.MH1 T1.MH2 U1.5 U2.3 U2.5 U2.9 U2.11 U2.16 U2.18 U2.19 U2.20 U2.24 U2.30 U2.31 U2.34 U2.35 U2.36 U2.40 U2.54 U2.57 U2.61 U2.62 U2.63 U2.64 U2.67 U2.68 U2.69 U2.70 U2.72 U2.73 U2.75 U2.76 U2.80 U2.82 U2.88 U2.90 U2.97 U2.99 U2.100 U2.101 U2.102 U2.104 U2.106 U2.109 U2.110 U2.111 U2.112 U2.115 U2.116 U2.117 U2.118 U2.121 U2.122 U2.123 U2.124 U2.127 U2.128 U2.129 U2.130 U2.133 U2.134 U2.135 U2.136 U2.139 U2.140 U2.141 U2.142 U2.143 U2.145 U2.146 U2.147 U2.148 U2.149 U2.151 U2.152 U2.153 U2.154 U2.157 U2.158 U2.159 U2.160 U2.163 U2.164 U2.165 U2.166 U2.169 U2.170 U2.171 U2.172 U2.175 U2.176 U2.177 U2.178 U2.181 U2.182 U2.183 U2.184 U2.187 U2.188 U2.189 U2.190 U2.193 U2.194 U2.195 U2.196 U2.199 U2.200 U3.5 U4.1 U4.17 U4.25 U7.4

## Polygon pours and split planes (outlines as drawn)
GND on Top Layer "GND_L01_P015" (solid, remove dead copper, pour order 15): -3.325,195.025 -3.325,-3.15 112.9,-3.15 113.8,-2.25 113.8,195.775 -2.575,195.775
NetF1_1 on Top Layer "NETF1_1_L01_P000" (solid, pour order 0): 98,167.75 101.5,167.75 101.5,184 98,184 101.5,184 98,184
NetD9_1 on Top Layer "NETD9_1_L01_P003" (solid, pour order 3): 86.25,175.875 86.25,171.58 89.25,171.58 89.03,171.8 89.03,175.875
NetD9_1 on Top Layer "NETD9_1_L01_P001" (solid, pour order 1): 86.25,172 86.25,168.25 97.75,168.25 97.75,172
NetC16_2 on Top Layer "NETC16_2_L01_P014" (solid, pour order 14): 61.174,156.25 61.174,154.75 64.5,154.75 64.5,154 73.601,154 73.601,156.25
+24V on Top Layer "+24V_L01_P013" (solid, pour order 13): 77.75,169 81.5,169 81.5,171.8 83.25,171.8 83.25,175.35 80.5,175.35 80.5,172.2 77.75,172.2
NetC17_2 on Top Layer "NETC17_2_L01_P012" (solid, pour order 12): 58.5,153.837 61,153.837 61,152.9 57.663,152.9 57.663,153.837 57.5,154 51.75,154 51.75,156.25 61.174,156.25 61.174,154.75 58.5,154.75
NetR29_2 on Top Layer "NETR29_2_L01_P011" (solid, pour order 11): 57.5,175.201 57.5,172.75 70.15,172.75 70.15,178.558 70.058,178.65 70.9,178.65 70.9,179.817 70.717,180 69.412,180 69.412,175.804 69.441,175.775 68.867,175.201
+5V on Top Layer "+5V_L01_P009" (solid, pour order 9): 54,185.25 54,176.512 46.5,176.512 46.5,167.5 57.5,167.5 57.5,176.462 58.5,176.462 58.5,185.25
NetC12_1 on Top Layer "NETC12_1_L01_P008" (solid, pour order 8): 68.5,188.5 68.5,186 71,186 70.9,185.9 70.9,182.85 70.5,182.85 70.5,181 68.5,181 68,181.5 68,185.1 64,185.1 63.8,184.9 63.8,178.924 68.5,178.924 68.5,180.25 71.5,180.25 71.413,180.337 71.413,183.25 72.9,183.25 72.934,183.284 72.934,188.5
NetC12_2 on Top Layer "NETC12_2_L01_P007" (solid, pour order 7): 70.5,181.25 69,181.25 69,185.25 70.5,185.25
NetC13_1 on Top Layer "NETC13_1_L01_P006" (solid, pour order 6): 70.5,180.25 70.5,175.998 76.702,175.998 76.238,176.462 76.238,177.599 72.5,177.599 72.5,180.25
NetC13_1 on Top Layer "NETC13_1_L01_P005" (solid, pour order 5): 80.25,177.599 80.25,172.75 77.75,172.75 77.75,175.875 74,175.875 74,177.599
+24V on Top Layer "+24V_L01_P004" (solid, pour order 4): 80.5,175.35 80.5,173 86,173 86,175.35
GND on Bottom Layer "GND_L02_P016" (solid, pour order 16): -2.625,192.95 -1.975,192.3 -1.975,-3.825 112.575,-3.825 113,-4.25 115.175,-2.075 115.175,192.1 -2.2,192.1 -2.85,192.75

## Silkscreen, mask and mechanical layers (free items; w line width, h text height)
Top Overlay:
  drawing of 47 lines, arcs and shapes, not listed
  text "PWM_ALIM" at 75.354,186.591 h1
  text "GND" at 80.504,180.504 h1
  text "[-]" at 91.821,175.604 h3 r90
  text "[+]" at 107.521,175.604 h3 r90
  text "+24[V]" at 101.104,171.896 h1 r270
  text "GND" at 94.054,170.646 h1 r270
  text "+24 [V]" at 79.004,167.966 h1 r270
  text "+5[V]" at 49.054,166.429 h1
  text "GND" at 58.254,163.242 h1
  text "+3.3[V]" at 69.079,158.242 h1
  text "SENSOR_+_1" at 18.829,114.521 h1
  text "SENSOR_-_1" at 18.829,111.021 h1
  text "2510_RegulationChauffage_MotherBoard" at 31.912,108.346 h1 r270
  text "BOILER_+_1" at 18.912,108.06 h1
  text "BOILER_-_1" at 18.912,104.81 h1
  text "EXTERNE 1" at 44.004,101.754 h1
  text "EXTERNE 2" at 60.284,101.754 h1
  text "EXTERNE 3" at 77.534,101.754 h1
  text "EXTERNE 4" at 94.034,101.754 h1
  text "SENSOR_+_2" at 19.004,90.171 h1
  text "SENSOR_-_2" at 19.004,86.81 h1
  text "LMS" at 35.647,84.902 h1.52 r270
  text "BOILER_+_2" at 19.087,83.31 h1
  text "BOILER_-_2" at 19.087,80.06 h1
  text "ADC_START_SYNC" at 56.151,71.4 h1 r270
  text "CM_24V_SENSE_1" at 48.271,71.171 h1 r270
  text "CM_24V_OUT_1" at 51.196,69.321 h1 r270
  text "24V_SENSE_2" at 68.626,68.505 h1 r270
  text "GND" at 103.904,68.448 h1
  text "SHIFT_DATA" at 89.821,67.571 h1 r270
  text "GND" at 36.254,67.004 h1
  text "SHIFT_CLK" at 92.321,66.571 h1 r270
  text "24V_OUT_1" at 94.971,66.485 h1 r270
  text "ADC_DRDY" at 87.396,65.696 h1 r270
  text "MISO_ADC" at 97.571,65.652 h1 r270
  text "MOSI_ADC" at 70.767,65.26 h1 r270
  text "SENSOR_+_3" at 18.754,65.06 h1
  text "SCK_ADC" at 74.771,64.704 h1 r270
  text "CMD_REL" at 84.87,64.704 h1 r270
  text "LATCH_2" at 66.074,64.551 h1 r270
  text "LED_ACT" at 77.157,64.551 h1 r270
  text "LATCH_1" at 63.771,64.329 h1 r270
  text "CS_ADC" at 53.521,63.846 h1 r270
  text "LATCH4" at 79.879,63.846 h1 r270
  text "LATCH3" at 82.379,63.796 h1 r270
  text "ADC_A0" at 58.671,63.592 h1 r270
  text "ADC_A1" at 61.271,63.338 h1 r270
  text "SENSOR_-_3" at 18.754,62.06 h1
  text "BOILER_+_3" at 18.754,58.56 h1
  text "BOILER_-_3" at 18.754,55.31 h1
  text "SENSOR_+_4" at 18.628,39.316 h1
  text "SENSOR_-_4" at 18.628,36.316 h1
  text "BOILER_+_4" at 18.628,32.816 h1
  text "BOILER_-_4" at 18.628,29.566 h1
  text "24V_OUT_2" at 18.504,14.671 h1
  text "24V_SENSE_2" at 18.504,11.671 h1
  text "24V_OUT_2" at 18.504,8.171 h1
  text "24V_SENSE_2" at 18.504,4.921 h1
  text "/WL_DISABLE" at 63.754,1.921 h1
  text "/BT_DISABLE" at 76.504,1.921 h1
  text "/RPIBOOT" at 53.754,1.754 h1
Outline:
  lines w0.254: 0.25,144.75 cw(c1.625,144.875) 1.5,146.25 33.75,146.25 ccw(c33.75,147.75) 35.25,147.75 35.25,170.25 35.25,188.75 cw(c36.75,188.75) 36.75,190.25 108,190.25 cw(c108,188) 110.25,188 110.25,170.25 110.25,20.25 110.25,8.25 ; 0.25,145 0.25,20.25 0.25,2.5 ccw(c2.5,2.5) 2.5,0.25 102.25,0.25 101.25,0.25 ; 102.256,0.25 108.75,0.25 ccw(c108.75,1.75) 110.25,1.75 110.25,8.5

## Text inside footprints (layer, text, board x,y; h text height)
U2: Top 3D Body "1-100" at 70.15,44.71 h0.81; Top 3D Body "101-200" at 70.15,10.71 h0.81